# EAGLE board sb3-0 (EAGLE 9.3.0)
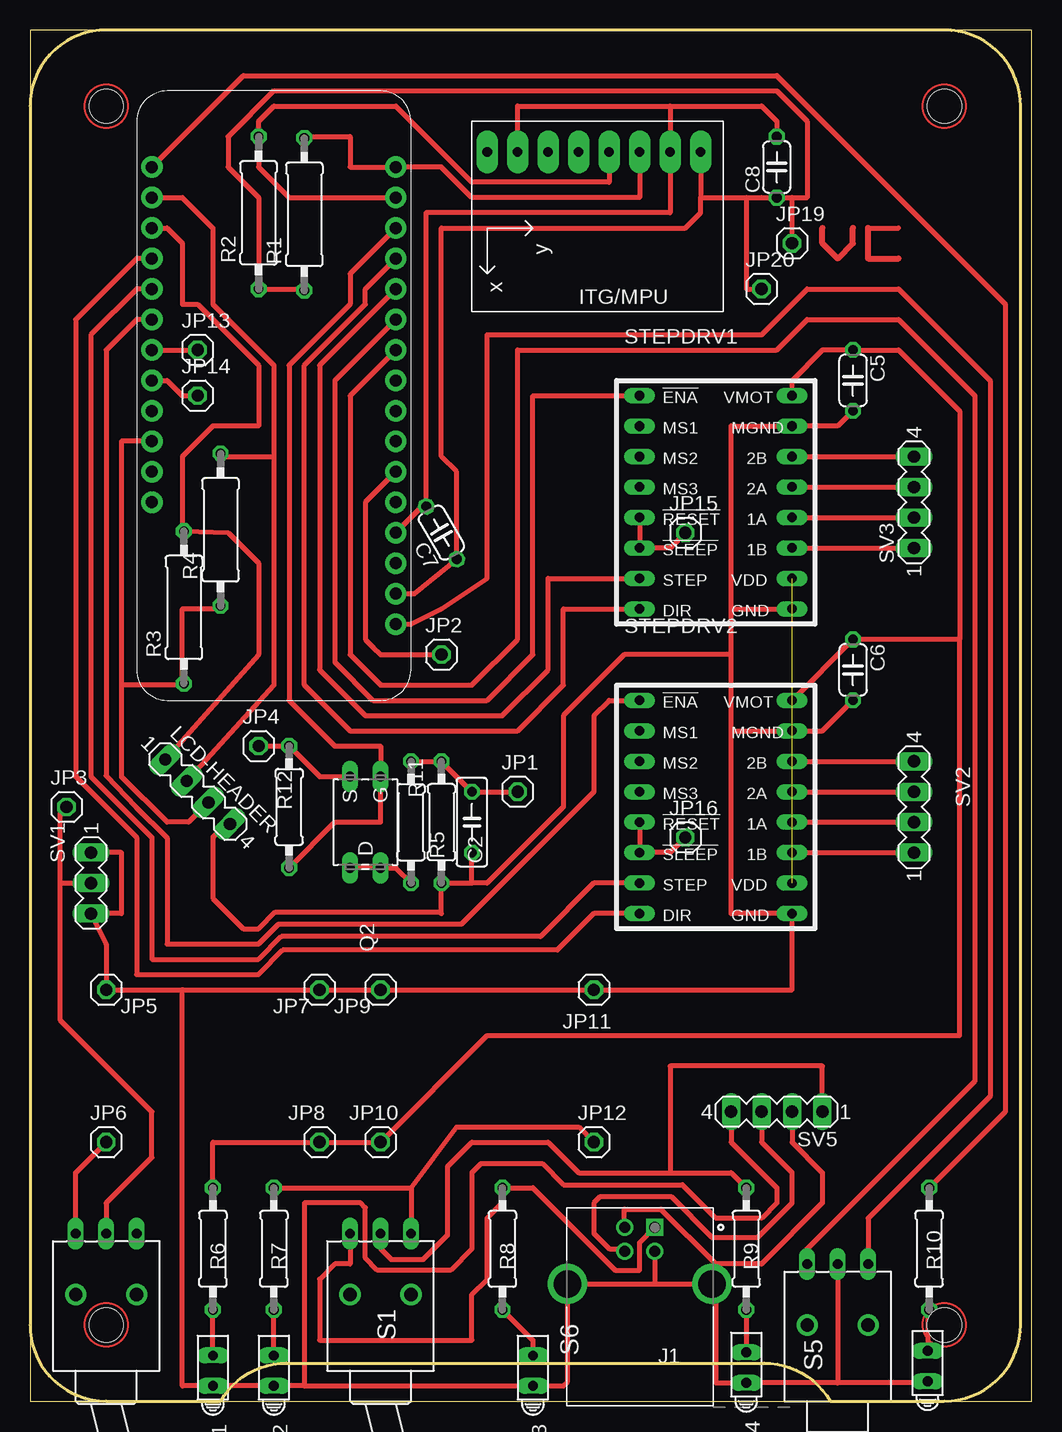
[diagram p0: board, top side]

Size 83.49 x 114.3 mm. Coordinates in mm from the lower left corner, seen from the top.
Outline: 66.67,0 76.2,0 arc90 82.55,6.35 82.55,107.95 arc90 76.2,114.3 6.35,114.3 arc90 0,107.95 0,6.35 arc90 6.35,0 15.88,0 arc-60 21.37,3.17 61.18,3.17 arc-60 66.67,0
Outline: 0,0 83.49,0 83.49,114.29 0,114.29 0,0
Copper layers (1*16): Top 0.035mm / dielectric 1.5mm / Bottom 0.035mm
Design rules "default": minimum track width 6mil, minimum drill 0.35mm, track to track 6mil, track to pad 6mil, pad to pad 6mil, via to via 6mil, smd to smd 6mil, copper to edge 40mil, drill to drill 6mil, minimum pad ring 10mil, minimum via ring 8mil, stop-mask expansion 4mil, vias tented up to drill 0mil, thermal gap 10mil
Holes 2.84 mm at 6.35,6.35 76.2,107.95 76.2,6.35 6.35,107.95

## Footprints (pad centres in the part's own frame; a part is rotated, then mirrored left to right if it is on the bottom)
C050-025X075 = drill 0.813 octagon: 1 -2.54,0; 2 2.54,0
C050-024X044 = drill 0.813 octagon: 1 -2.54,0; 2 2.54,0
HLMP6 = drill 0.813 long: A -1.27,0; K 1.27,0
CUI_UJ2-BH-1-TH = drill 0.92 square: 1 0,0 | drill 0.92: 2 -2.5,0; 3 -2.5,-2; 4 0,-2 | drill 2.3: SH1 -7.27,-4.71; SH2 4.77,-4.71
1X01 = drill 1.016 octagon: 1 0,0
MA04-1 = drill 1.016 long: 1 -3.81,0; 2 -1.27,0; 3 1.27,0; 4 3.81,0
FEATHERWING_NOHOLES = drill 1 pad 1.778: 1 6.35,1.27; 2 8.89,1.27; 3 11.43,1.27; 4 13.97,1.27; 5 16.51,1.27; 6 19.05,1.27; 7 21.59,1.27; 8 24.13,1.27; 9 26.67,1.27; 10 29.21,1.27; 11 31.75,1.27; 12 34.29,1.27; 13 36.83,1.27; 14 39.37,1.27; 15 41.91,1.27; 16 44.45,1.27; 17 44.45,21.59; 18 41.91,21.59; 19 39.37,21.59; 20 36.83,21.59; 21 34.29,21.59; 22 31.75,21.59; 23 29.21,21.59; 24 26.67,21.59; 25 24.13,21.59; 26 21.59,21.59; 27 19.05,21.59; 28 16.51,21.59
C370-01 = drill 0.813 long: D -3.81,1.27; D1 -3.81,-1.27; G 3.81,-1.27; S 3.81,1.27
0309/12 = drill 0.813 octagon: 1 -6.35,0; 2 6.35,0
0207/10 = drill 0.813 octagon: 1 -5.08,0; 2 5.08,0
9070-1W = drill 0.813 long: 1 5.08,-2.54; 2 5.08,0; 3 5.08,2.54 | drill 1.118 pad 1.778: B 0,-2.54; B1 0,2.54
POLOLULU2128 = drill 0.8 long: 1 -7.62,7.62; 2 -7.62,5.08; 3 -7.62,2.54; 4 -7.62,0; 5 -7.62,-2.54; 6 -7.62,-5.08; 7 -7.62,-7.62; 8 -7.62,-10.16; 9 5.08,-10.16; 10 5.08,-7.62; 11 5.08,-5.08; 12 5.08,-2.54; 13 5.08,0; 14 5.08,2.54; 15 5.08,5.08; 16 5.08,7.62
MA03-1 = drill 1.016 long: 1 -2.54,0; 2 0,0; 3 2.54,0
GY-521 = drill 0.8 pad 1.778 long: ADO -8.89,-6.35; GND -8.89,6.35; INT -8.89,-8.89; SCL -8.89,3.81; SDA -8.89,1.27; VCC -8.89,8.89; XCL -8.89,-3.81; XDA -8.89,-1.27

## Placement (x,y rotation side)
C2  [C050-025X075]  36.83,48.26 90 top
C5  [C050-024X044]  68.58,85.09 270 top
C6  [C050-024X044]  68.58,60.96 270 top
C7  [C050-024X044]  34.29,72.39 120 top
C8  [C050-024X044]  62.23,102.87 90 top
D1  HLMP6  [HLMP6]  15.24,2.54 90 top
D2  HLMP6  [HLMP6]  20.32,2.54 90 top
D3  HLMP6  [HLMP6]  41.91,2.54 90 top
D4  HLMP6  [HLMP6]  59.69,2.79 90 top
D5  HLMP6  [HLMP6]  74.8,2.92 90 top
J1  UJ2-BH-1-TH  [CUI_UJ2-BH-1-TH]  52.07,14.48 0 top
JP1  [1X01]  40.64,50.8 0 top
JP2  [1X01]  34.29,62.23 0 top
JP3  [1X01]  3.05,49.53 0 top
JP4  [1X01]  19.05,54.61 0 top
JP5  [1X01]  6.35,34.29 0 top
JP6  [1X01]  6.35,21.59 0 top
JP7  [1X01]  24.13,34.29 0 top
JP8  [1X01]  24.13,21.59 0 top
JP9  [1X01]  29.21,34.29 0 top
JP10  [1X01]  29.21,21.59 0 top
JP11  [1X01]  46.99,34.29 0 top
JP12  [1X01]  46.99,21.59 0 top
JP13  [1X01]  13.97,87.63 0 top
JP14  [1X01]  13.97,83.82 0 top
JP15  [1X01]  54.61,72.39 0 top
JP16  [1X01]  54.61,46.99 0 top
JP19  [1X01]  63.5,96.52 0 top
JP20  [1X01]  60.96,92.71 0 top
LCD-HEADER  [MA04-1]  13.97,50.8 315 top
MS2  FEATHERWING_NOHOLES  [FEATHERWING_NOHOLES]  31.75,58.42 90 top
Q2  IRFD9120  [C370-01]  27.94,48.26 90 top
R1  2K2  [0309/12]  22.86,98.93 90 top
R2  2K2  [0309/12]  19.05,99.06 90 top
R3  4K7  [0309/12]  12.83,66.17 90 top
R4  4K7  [0309/12]  15.88,72.64 90 top
R5  [0207/10]  31.75,48.26 270 top
R6  [0207/10]  15.24,12.7 90 top
R7  [0207/10]  20.32,12.7 90 top
R8  [0207/10]  39.37,12.7 90 top
R9  [0207/10]  59.69,12.7 90 top
R10  [0207/10]  74.93,12.7 90 top
R11  [0207/10]  34.29,48.26 90 top
R12  [0207/10]  21.59,49.53 270 top
S1  [9070-1W]  29.21,8.89 90 top
S5  [9070-1W]  67.31,6.35 90 top
S6  [9070-1W]  6.35,8.89 90 top
STEPDRV1  POLOLULU2128  [POLOLULU2128]  58.42,76.2 0 top
STEPDRV2  POLOLULU2128  [POLOLULU2128]  58.42,50.8 0 top
SV1  [MA03-1]  5.08,43.18 270 top
SV2  [MA04-1]  73.66,49.53 90 top
SV3  [MA04-1]  73.66,74.93 90 top
SV5  [MA04-1]  62.23,24.13 180 top
U1  GY-521MPU6050  [GY-521]  46.99,95.25 270 top

## Library data of the parts
C2 C5-C8 = rcl; SPICEPREFIX: C
D1-D5 = display-hp; MF: AGILENT TECHNOLOGIES; MPN: HLMP-6500; OC_FARNELL: 1652490; OC_NEWARK: 40K0088
J1 = UJ2-BH-1-TH; MANUFACTURER: CUI INC; PART_REV: 1.0; STANDARD: MANUFACTURER RECOMENDATION
JP1-JP16 JP19 JP20 = pinhead
LCD-HEADER SV1-SV3 SV5 = con-lstb; OC_FARNELL: unknown; OC_NEWARK: unknown
MS2 = microbuilder
Q2 = transistor-small-signal
R1-R4 = resistor
R5-R12 = rcl; SPICEPREFIX: R
S1 S5 S6 = switch
STEPDRV1 STEPDRV2 = stepper_drivers_etc
U1 = gy-521

## Nets
3V: C7.1 C8.1 JP19.1 JP20.1 MS2.2 R1.1 R2.1 U1.VCC
N$2: C7.2 C8.2 MS2.4 U1.ADO U1.GND
N$3: MS2.13 STEPDRV1.8
N$4: MS2.1 S5.1
N$5: JP15.1 STEPDRV1.5 STEPDRV1.6
N$6: MS2.14 Q2.G R12.2
N$7: JP16.1 STEPDRV2.5 STEPDRV2.6
N$8: STEPDRV2.14 SV2.4
N$9: C2.1 C5.2 C6.2 D1.A D2.A D3.A D4.A D5.A J1.4 J1.SH1 J1.SH2 JP5.1 JP7.1 JP9.1 JP11.1 LCD-HEADER.4 R11.1 S5.2 STEPDRV1.9 STEPDRV1.15 STEPDRV2.9 STEPDRV2.15 SV1.1 SV1.3 SV5.4
N$11: LCD-HEADER.1 MS2.19 R3.2
N$12: STEPDRV2.13 SV2.3
N$13: STEPDRV2.12 SV2.2
N$14: STEPDRV2.11 SV2.1
N$15: MS2.12 STEPDRV1.7
N$16: STEPDRV1.14 SV3.4
N$17: MS2.16 R1.2 U1.SCL
N$18: STEPDRV1.13 SV3.3
N$19: STEPDRV1.12 SV3.2
N$20: STEPDRV1.11 SV3.1
N$21: MS2.11 STEPDRV1.1
N$22: J1.2 SV5.2
N$23: J1.3 SV5.3
N$24: JP4.1 Q2.S R12.1
N$25: MS2.15 R2.2 U1.SDA
N$27: MS2.20 STEPDRV2.8
N$28: MS2.17 R10.2
N$29: MS2.21 STEPDRV2.7
N$30: C2.2 JP1.1 R5.1 R11.2
N$31: MS2.10 S5.3
N$32: JP3.1 S6.2 SV1.2
N$33: JP2.1 MS2.6
N$34: MS2.22 STEPDRV2.1
N$35: LCD-HEADER.2 MS2.18 R4.2
N$36: JP13.1 MS2.23
N$37: JP14.1 MS2.24
N$40: JP6.1 S6.3
N$41: C5.1 C6.1 JP8.1 JP10.1 R6.2 STEPDRV1.16 STEPDRV2.16
N$45: JP12.1 R7.2 S1.1
N$48: R9.2 S1.2 SV5.1
N$51: Q2.D Q2.D1 R5.2
N$52: D4.K R9.1
N$53: D1.K R6.1
N$54: D2.K R7.1
N$55: D3.K R8.1
N$56: J1.1 R8.2 S1.3
N$57: D5.K R10.1
USB: LCD-HEADER.3 MS2.26 R3.1 R4.1
VDD: STEPDRV1.10 STEPDRV2.10

## Tracks (layer width: path | path; a pad name or v marks a point on that pad's centre or on a via)
3V
  Top 0.406: U1.VCC 55.88,100.33 | 55.88,100.33 59.69,100.33 | 59.69,100.33 60.96,100.33 C8.1 | C8.1 63.5,100.33 JP19.1 | C8.1 64.77,100.33 64.77,106.68 62.23,109.22 20.32,109.22 16.51,105.41 16.51,102.87 19.05,100.33 R2.1 22.86,92.71 R1.1 | MS2.2 32.03,67.31 C7.1 35.56,77.47 34.29,78.74 34.29,97.79 54.61,97.79 55.88,99.06 55.88,100.33 | 59.69,100.33 59.69,92.71 JP20.1
N$1
  Top 0.508: 68.58,97.79 68.58,96.52 67.31,95.25 66.04,96.52 66.04,97.79
N$2
  Top 0.406: C8.2 62.23,106.68 60.96,107.95 53.34,107.95 | 53.34,107.95 U1.GND 53.34,99.06 33.02,99.06 33.02,74.93 | U1.ADO 40.64,107.95 53.34,107.95 | MS2.4 33.02,74.93 | C7.2 33.02,74.93
N$3
  Top 0.406: MS2.13 27.94,92.71 27.94,91.44 22.86,86.36 22.86,59.69 26.67,55.88 40.64,55.88 44.45,59.69 44.45,66.04 STEPDRV1.8
N$4
  Top 0.406: MS2.1 31.75,64.77 34.29,66.04 38.1,68.58 38.1,88.9 60.96,88.9 64.77,92.71 72.39,92.71 80.01,85.09 80.01,25.4 69.85,15.24 S5.1
N$5
  Top 0.406: STEPDRV1.5 STEPDRV1.6 53.34,71.12 JP15.1
N$6
  Top 0.406: MS2.14 26.67,93.98 26.67,91.44 21.59,86.36 21.59,58.42 25.4,54.61 29.21,54.61 Q2.G 29.21,48.26 25.4,48.26 R12.2
N$7
  Top 0.406: STEPDRV2.5 STEPDRV2.6 53.34,45.72 JP16.1
N$8
  Top 0.406: STEPDRV2.14 SV2.4
N$9
  Top 0.406: 12.7,34.29 JP5.1 6.35,38.1 SV1.3 7.62,40.64 7.62,45.72 SV1.1 | 12.7,34.29 JP7.1 JP9.1 JP11.1 63.5,34.29 STEPDRV2.9 58.42,40.64 58.42,55.88 | 36.83,43.18 R11.1 34.29,40.64 34.16,40.77 20.45,40.77 19.05,39.37 17.78,39.37 15.24,41.91 15.24,46.99 16.36,48.11 LCD-HEADER.4 | 36.83,43.18 C2.1 | 58.42,55.88 STEPDRV2.15 66.04,55.88 C6.2 | 58.42,66.04 STEPDRV1.9 | 58.42,66.04 58.42,81.28 STEPDRV1.15 67.31,81.28 C5.2 | 58.42,55.88 58.42,62.23 | 58.42,62.23 58.42,66.04 | D5.A 74.68,1.52 67.31,1.52 | 67.31,1.52 D4.A 57.15,1.52 57.15,9.46 J1.SH2 52.07,9.77 | 22.86,1.27 D2.A D1.A 12.7,1.27 12.7,34.29 | S5.2 67.31,1.52 | 52.07,9.77 J1.SH1 44.8,1.62 44.45,1.27 D3.A 22.86,1.27 | SV5.4 58.42,21.59 62.23,17.78 62.23,16.51 60.96,15.24 57.15,15.24 54.36,18.03 44.45,18.03 42.67,19.81 37.59,19.81 36.83,19.05 36.83,12.7 35.05,10.92 28.96,10.92 27.94,11.94 27.94,16.13 27.56,16.51 22.86,16.51 22.86,1.27 | 58.42,62.23 49.53,62.23 44.45,57.15 44.45,49.53 38.1,43.18 36.83,43.18 | J1.4 52.07,9.77
N$11
  Top 0.406: MS2.19 11.43,97.79 12.7,96.52 12.7,91.44 13.97,91.44 19.05,86.36 19.05,81.28 15.24,81.28 12.7,78.74 12.7,72.74 R3.2 16.51,72.39 19.05,69.85 19.05,62.23 LCD-HEADER.1
N$12
  Top 0.406: STEPDRV2.13 SV2.3
N$13
  Top 0.406: STEPDRV2.12 SV2.2
N$14
  Top 0.406: STEPDRV2.11 SV2.1
N$15
  Top 0.406: MS2.12 24.13,86.36 24.13,60.96 27.94,57.15 39.37,57.15 43.18,60.96 43.18,68.58 STEPDRV1.7
N$16
  Top 0.406: STEPDRV1.14 SV3.4
N$17
  Top 0.406: U1.SCL 50.8,100.33 36.83,100.33 34.29,102.87 MS2.16 26.67,102.87 26.67,105.41 22.99,105.41 R1.2
N$18
  Top 0.406: STEPDRV1.13 SV3.3
N$19
  Top 0.406: STEPDRV1.12 SV3.2
N$20
  Top 0.406: STEPDRV1.11 SV3.1
N$21
  Top 0.406: STEPDRV1.1 41.91,83.82 41.91,62.23 38.1,58.42 28.57,58.42 25.4,61.59 25.4,85.09 MS2.11
N$22
  Top 0.406: SV5.2 63.5,21.59 66.04,19.05 66.04,16.51 60.96,11.43 57.15,11.43 52.58,16 49.53,16 49.53,14.52 J1.2
N$23
  Top 0.406: SV5.3 60.96,21.59 63.5,19.05 63.5,16.51 60.64,13.65 56.83,13.65 53.47,17.02 47.5,17.02 46.99,16.51 46.99,13.97 48.26,12.7 49.35,12.7 J1.3
N$24
  Top 0.406: JP4.1 R12.1 24.13,52.07 Q2.S 26.19,52.07
N$25
  Top 0.406: U1.SDA 48.26,101.6 36.83,101.6 30.48,107.95 20.32,107.95 19.05,106.68 R2.2 19.05,102.87 21.59,100.33 MS2.15
N$26
  Top 0.406: 69.85,97.79 72.39,97.79
  Top 0.508: 69.85,97.79 69.85,95.25 72.39,95.25
N$27
  Top 0.406: STEPDRV2.8 46.99,40.64 43.94,37.59 21.08,37.59 19.05,35.56 8.89,35.56 8.89,46.99 3.81,52.07 3.81,90.17 8.89,95.25 MS2.20
N$28
  Top 0.406: R10.2 81.28,24.13 81.28,91.44 62.23,110.49 17.78,110.49 MS2.17
N$29
  Top 0.406: STEPDRV2.7 46.99,43.18 42.55,38.73 20.95,38.73 19.05,36.83 10.16,36.83 10.16,46.99 5.08,52.07 5.08,88.9 8.89,92.71 MS2.21
N$30
  Top 0.406: R5.1 R11.2 C2.2 JP1.1
N$31
  Top 0.406: S5.3 64.77,12.7 78.74,26.67 78.74,83.82 72.39,90.17 64.77,90.17 62.23,87.63 40.64,87.63 40.64,63.5 36.83,59.69 29.21,59.69 26.67,62.23 26.67,83.82 MS2.10
N$32
  Top 0.406: S6.2 6.35,16.51 10.16,20.32 10.16,24.13 2.54,31.75 2.54,43.18 | 2.54,43.18 SV1.2 | 2.54,43.18 2.54,49.02 JP3.1
N$33
  Top 0.406: MS2.6 27.94,74.93 27.94,63.5 28.57,62.87 29.21,62.23 JP2.1
N$34
  Top 0.406: STEPDRV2.1 48.26,58.42 46.99,57.15 46.99,50.8 35.94,39.75 20.7,39.75 19.05,38.1 11.43,38.1 11.43,46.96 11.42,46.98 8.83,49.53 6.35,52.13 6.35,87.63 8.89,90.17 MS2.22
N$35
  Top 0.406: MS2.18 12.7,100.33 15.24,97.79 15.24,91.44 20.32,86.36 20.32,78.74 | LCD-HEADER.2 20.32,59.69 20.32,78.74 | R4.2 16.13,78.74 20.32,78.74
N$36
  Top 0.406: MS2.23 JP13.1
N$37
  Top 0.406: MS2.24 11.43,85.09 12.7,83.82 JP14.1
N$40
  Top 0.406: S6.3 3.81,19.05 JP6.1
N$41
  Top 0.406: STEPDRV2.16 C6.1 77.47,63.5 | R6.2 15.24,21.59 JP8.1 JP10.1 38.1,30.48 77.47,30.48 77.47,63.5 | STEPDRV1.16 63.5,85.09 66.04,87.63 C5.1 72.39,87.63 77.47,82.55 77.47,63.5
N$45
  Top 0.406: 31.75,17.78 S1.1 | R7.2 31.75,17.78 | 31.75,17.78 35.56,22.86 45.72,22.86 JP12.1
N$48
  Top 0.406: S1.2 29.21,12.7 30.1,11.81 32.77,11.81 34.8,13.84 34.8,19.56 36.83,21.59 43.18,21.59 45.72,19.05 53.34,19.05 | R9.2 58.42,19.05 53.34,19.05 | SV5.1 66.04,27.94 53.34,27.94 53.34,19.05
N$51
  Top 0.406: Q2.D Q2.D1 30.48,44.45 R5.2
N$52
  Top 0.406: R9.1 D4.K
N$53
  Top 0.406: D1.K R6.1
N$54
  Top 0.406: D2.K R7.1
N$55
  Top 0.406: R8.1 41.91,5.08 D3.K
N$56
  Top 0.406: S1.3 26.67,11.43 25.4,11.43 24.13,10.16 24.13,5.08 36.83,5.08 36.83,8.89 38.1,10.16 38.1,15.24 39.37,16.51 R8.2 41.91,17.78 48.77,10.92 50.8,10.92 50.8,13.21 J1.1
N$57
  Top 0.406: R10.1 74.8,7.49 D5.K
USB
  Top 0.406: LCD-HEADER.3 13.23,48.26 11.43,48.26 7.62,52.07 7.62,59.69 | MS2.26 7.62,80.01 7.62,59.69 | 7.62,59.69 12.7,59.69 R3.1 12.7,59.94 12.7,66.04 15.62,66.04 R4.1
VDD  (1 unrouted)
(copper drawn outside any net)
  shapes: Top area x7, Top circle x4